# Altium PCB Distro_layout_top_buck.PcbDoc
Units mm, origin at the board's own origin, x right, y up, seen from the top; angles counter-clockwise.
Board outline 45.08 x 37.66 mm, 2 copper layers (Top Layer, Bottom Layer); 19 components, 12 nets, 66 pads, 2 vias.
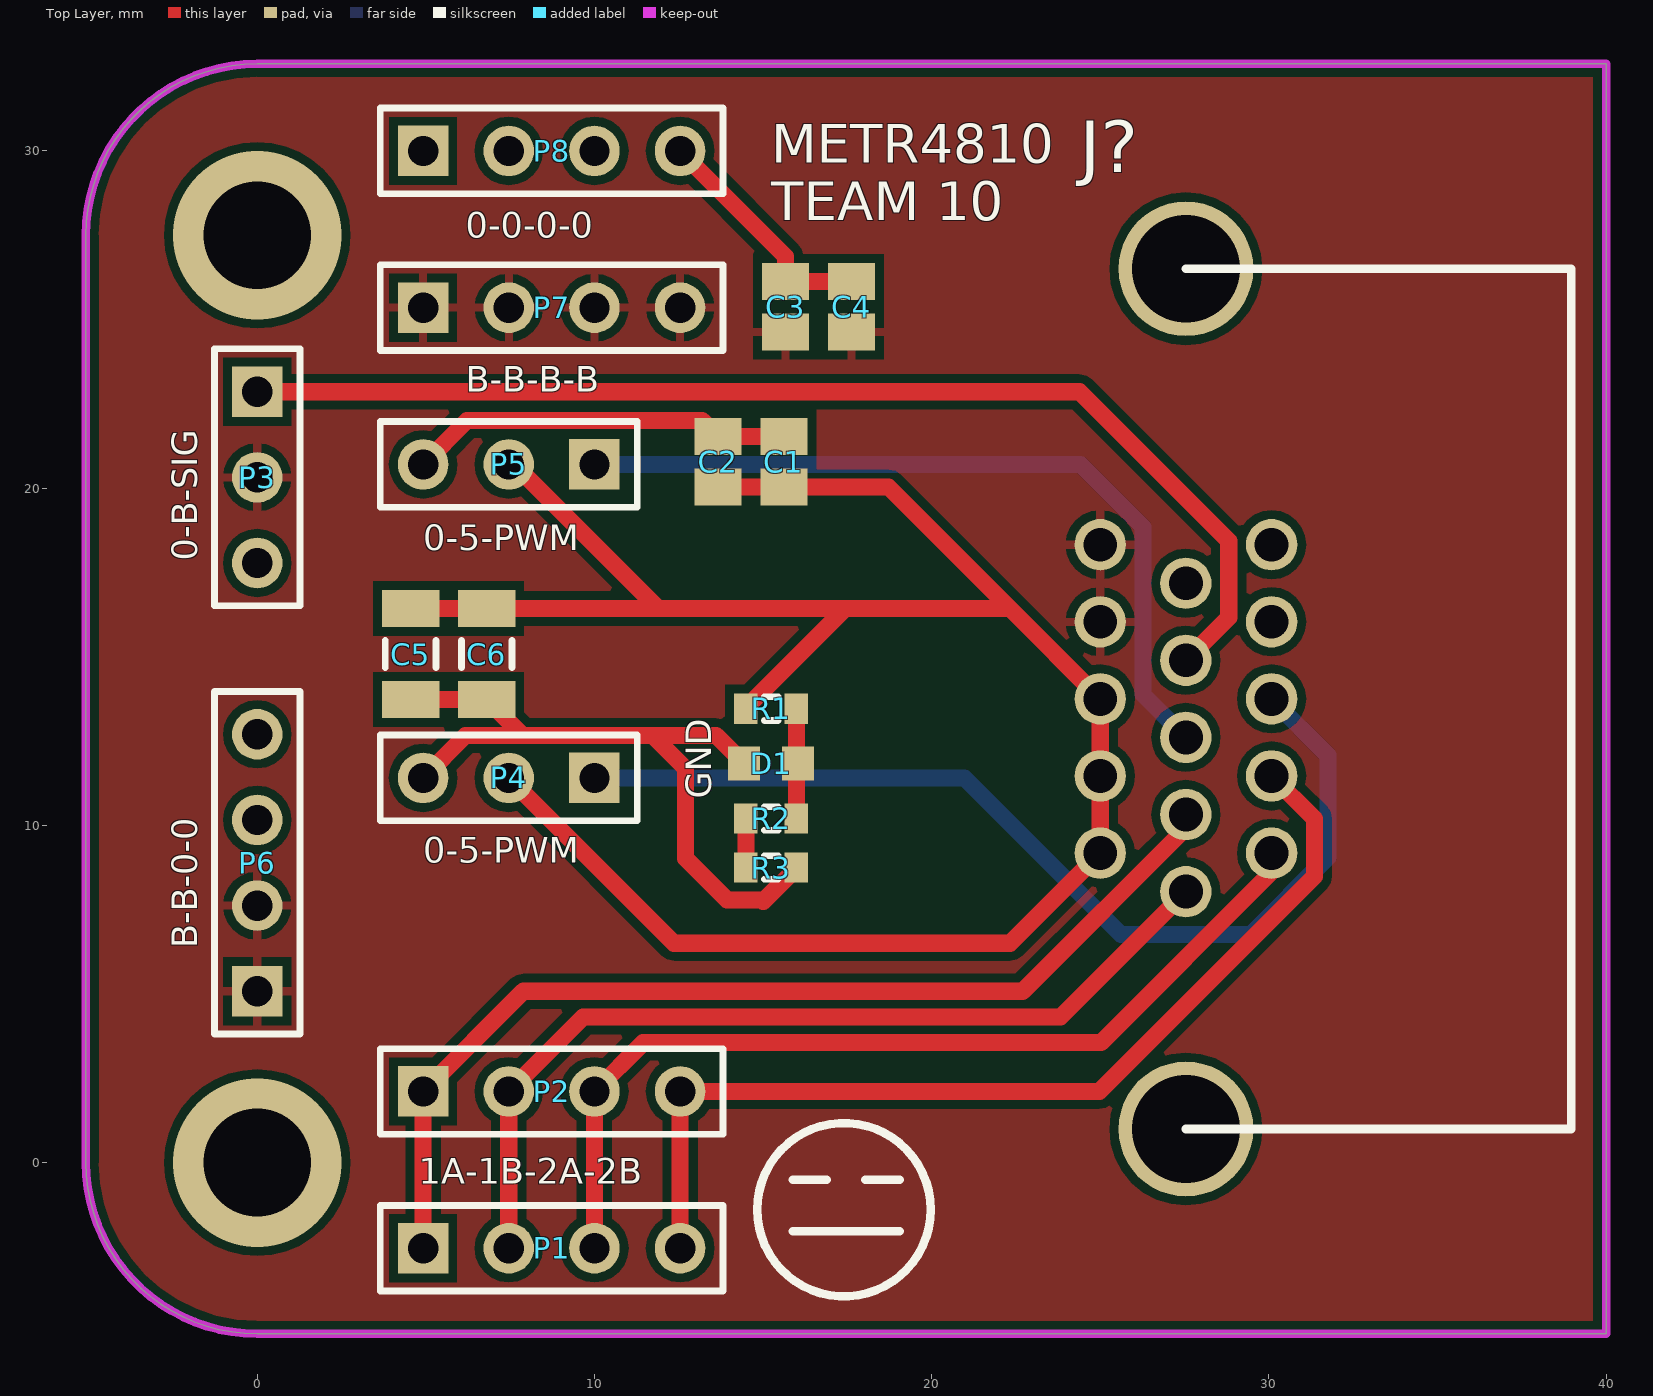
[diagram p0: Top Layer view]
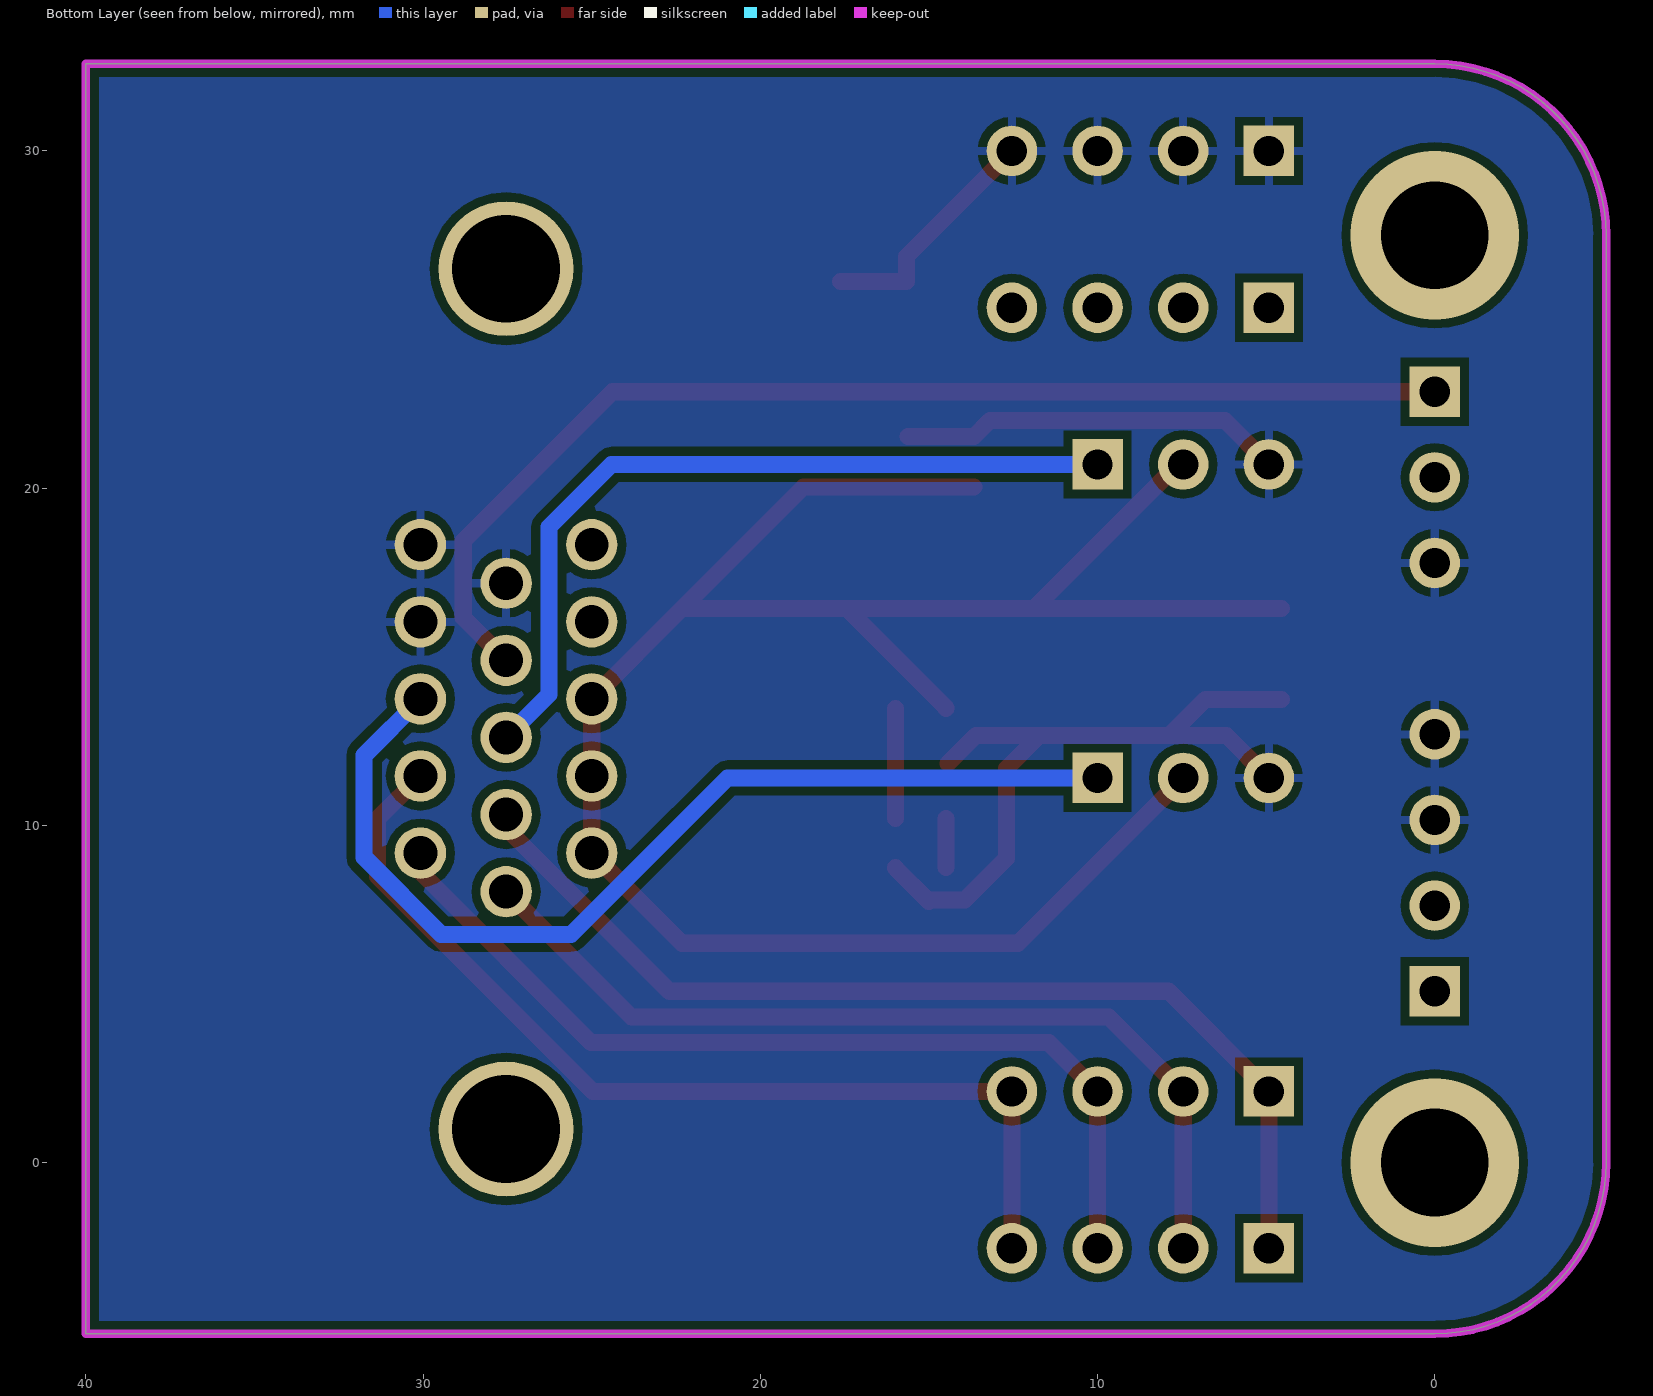
[diagram p1: Bottom Layer view, seen from below]

## Layer stack, top to bottom
Top Solder: solder mask 0.0102, Solder Resist, Dk 3.5
Top Layer: signal copper 0.0356
Dielectric 1: dielectric 0.32, FR-4, Dk 4.8
Bottom Layer: signal copper 0.0356
Bottom Solder: solder mask 0.0102, Solder Resist, Dk 3.5

## Board outline
-5.08,0 ccw(c0,0) 0,-5.08 40,-5.08 40,32.58 0,32.58 ccw(c0,27.5) -5.08,27.5

## Design rules (kind name [scope] priority, off if disabled: settings)
Clearance [All] p1: gap=0.254
PolygonConnect [All] p1: connectstyle=Relief reliefconductorwidth=0.254 reliefentries=4 polygonreliefangle="90 Angle" airgapwidth=0.254
RoomDefinition Distro_schematic [InComponentClass('Distro_schematic')] p1: confinementstyle=ConfineIn formatcopy=TRUE lockcomponents=FALSE outline -5.08,-5.08 40,-5.08 40,32.58 -5.08,32.58
RoutingVias [All] p1: holewidth=0.711 width=1.27 viastyle="Through Hole" minholewidth=0.711 minwidth=1.27 maxholewidth=0.711 maxwidth=1.27
SolderMaskExpansion [All] p1: expansion=0.102
Width [All] p1: maxlimit=1.016 minlimit=0.254 preferedwidth=0.508
30 further rules are at their usual default settings.

## Components (designator, comment, footprint, x,y, rotation, side; value= is the part's Value field where it differs from the comment)
C1 "Cap Pol3" C0805 15.621,20.783 r90 top
C2 "Cap Pol3" C0805 13.667,20.783 r90 top
C3 "Cap Pol3" C0805 15.669,25.383 r90 top
C4 "Cap Pol3" C0805 17.624,25.383 r90 top
C5 "Cap Semi" C1206 4.55,15.08 r90 top
C6 "Cap Semi" C1206 6.804,15.08 r90 top
D1 "LED1" L0603 15.24,11.833 r180 top
J? "Connector 15" PCBComponent_1 25,18.322 r270 top
P1 "Header 4" HDR1X4 4.92,-2.54 r0 top
P2 "Header 4" HDR1X4 4.92,2.109 r0 top
P3 "Header 3" HDR1X3 0,22.86 r270 top
P4 "Header 3" HDR1X3 10,11.406 r180 top
P5 "Header 3" HDR1X3 10,20.703 r180 top
P6 "Header 4" HDR1X4 0,5.08 r90 top
P7 "Header 4" HDR1X4 4.92,25.351 r0 top
P8 "Header 4" HDR1X4 4.92,30 r0 top
R1 "Res3" J1-0603 15.24,13.462 r0 top
R2 "Res3" J1-0603 15.24,10.203 r180 top
R3 "Res3" J1-0603 15.24,8.749 r0 top

## Footprints (in the part's own frame and the unit in brackets; to place one, negate y for a bottom-side part, rotate by r counter-clockwise, add the part's x,y. Pads: shape width x height; smd on the part's side, far side on the other; paste and mask are expansions set on the pad)
C0805 [mm] "Chip Capacitor, Body 2.0x1.3mm, IPC High Density"
  rect 1.1x1.4 smd: 1(-0.75,0) 2(0.75,0)
  body extent -1.1,-0.72 1.1,0.72, height 1.4
C1206 [mm] "Chip Capacitor, Body 3.2x1.6mm, IPC High Density"
  rect 1.1x1.7 smd: 1(-1.35,0) 2(1.35,0)
  silkscreen extent -0.4,-0.75 0.4,0.75, body extent -1.7,-0.9 1.7,0.9, height 1.3
HDR1X3 [mm] "Connector; Header; 3 Position"
  rect 1.5x1.5 hole 0.9: 1(0,0)
  round 1.5 hole 0.9: 2(2.54,0) 3(5.08,0)
  silkscreen extent -1.27,-1.27 6.35,1.27
HDR1X4 [mm] "Connector; Header; 4 Position"
  rect 1.5x1.5 hole 0.9: 1(0,0)
  round 1.5 hole 0.9: 2(2.54,0) 3(5.08,0) 4(7.62,0)
  silkscreen extent -1.27,-1.27 8.89,1.27
J1-0603 [mm] "Chip Resistor, Body 1.6x0.8mm, IPC High Density"
  rect 0.7x0.9 smd: 1(-0.75,0) 2(0.75,0)
  silkscreen extent -0.2,-0.35 0.2,0.35, body extent -0.85,-0.48 0.85,0.48, height 0.9
L0603 [mm]
  rect 0.95x1 smd: 1(-0.8,0) 2(0.8,0)
PCBComponent_1 [mil]
  round 60 hole 39.37: 1(360,200) 2(270,200) 3(180,200) 4(90,200) 5(0,200) 6(405,100) 7(315,100) 8(225,100) 9(135,100) 10(45,100) 11(360,0) 12(270,0) 13(180,0) 14(90,0) 15(0,0)
  round 157.48 hole 125.98: 16(682.17,100) 17(-322.17,100)
  silkscreen extent -322,100 682,550

## Part data
C1 C2 C3 C4: "Polarized Capacitor (Surface Mount)"
C5 C6: "Capacitor (Semiconductor SIM Model)"
D1: "Typical RED GaAs LED"
J?: "Receptacle Assembly, 15-Pin, Sim Line Connector"
P1 P2 P6 P7 P8: "Header, 4-Pin"
P3 P4 P5: "Header, 3-Pin"
R1 R2 R3: "Resistor"

## Via types
v1: diameter 5, hole 3.2, Top Layer to Bottom Layer, 2 vias

## Nets (pads, with @x,y where several pads share a name; then routed paths per layer and width w, separated by ;. In a path a pad name is that pad's centre, name@x,y a point inside that pad or via, vN(x,y) a via of type N, cw(c..) or ccw(c..) an arc to the next point about the centre after c; other vN are vias at no path point)
BAT: C3.1 C4.1 J?.14 J?.15 P3.2 P6.1 P6.2 P7.1 P7.2 P7.3 P7.4
CAM_SIG: J?.9 P3.1 | length 34.7
  Top Layer w0.508: P3.1 24.384,22.86 28.81,18.434 28.81,16.163 J?.9
GND: C1.2 C2.2 C3.2 C4.2 C5.1 C6.1 D1.2 J?.4 J?.5 J?.10 P3.3 P4.3 P5.3 P6.3 P6.4 P8.1 P8.2 P8.3 P8.4 R3.2 | length 41
  Top Layer w0.508: C5.1 C6.1 7.871,12.664 ; P4.3 6.178,12.664 7.871,12.664 ; P5.3 6.223,22.006 13.194,22.006 C2.2 C1.2 ; P8.4 15.669,26.871 C3.2 C4.2 ; D1.2 13.609,12.664 11.72,12.664 ; R3.2 15.99,8.731 15.006,7.747 14.962,7.791 13.93,7.791 12.7,9.021 12.7,11.684 11.72,12.664 ; 7.871,12.664 11.72,12.664
MOTOR_1A: J?.7 P1.1 P2.1 | length 30.9
  Top Layer w0.508: P1.1 P2.1 7.891,5.08 22.698,5.08 27.54,9.922 J?.7
MOTOR_1B: J?.6 P1.2 P2.2 | length 27.2
  Top Layer w0.508: P1.2 P2.2 9.669,4.318 23.823,4.318 J?.6
MOTOR_2A: J?.1 P1.3 P2.3 | length 28
  Top Layer w0.508: P1.3 P2.3 11.447,3.556 25.019,3.556 30.08,8.617 J?.1
MOTOR_2B: J?.2 P1.4 P2.4 | length 29.6
  Top Layer w0.508: P1.4 P2.4 24.969,2.109 31.35,8.49 31.35,10.194 J?.2
NetD1_1: D1.1 R1.2 R2.1 | length 3.3
  Top Layer w0.508: R2.1 R1.2
NetR2_2: R2.2 R3.1 | length 1.5
  Top Layer w0.508: R3.1 R2.2
"PWM SV 1": J?.8 P5.1 | length 23.8
  Bottom Layer w0.508: P5.1 24.415,20.703 26.27,18.848 26.27,13.877 J?.8
"PWM SV 2": J?.3 P4.1 | length 30
  Bottom Layer w0.508: P4.1 20.976,11.406 25.617,6.765 29.463,6.765 31.75,9.052 31.75,12.08 J?.3
VCC: C1.1 C2.1 C5.2 C6.2 J?.11 J?.12 J?.13 P4.2 P5.2 R1.1 | length 67.4
  Top Layer w0.508: C5.2 C6.2 11.891,16.43 ; P4.2 12.363,6.503 22.325,6.503 J?.11 J?.12 J?.13 22.32,16.43 ; P5.2 7.618,20.703 11.891,16.43 ; C2.1 C1.1 18.717,20.033 22.32,16.43 ; R1.1@14.512,13.484 R1.1 14.49,13.48 17.44,16.43 ; 11.891,16.43 17.44,16.43 ; 17.44,16.43 22.32,16.43
pads on no net: J?.16 J?.17
copper on no net:
  other v1: 0,0 0,27.5

## Polygon pours and split planes (outlines as drawn)
BAT on Top Layer "BAT_L01_P000" (solid, remove dead copper, pour order 0): -5.08,-5.08 -5.08,32.58 40,32.58 40,-5.08
GND on Bottom Layer "GND_L02_P001" (solid, remove dead copper, pour order 1): -5.08,-5.08 -5.08,32.58 40,32.58 40,-5.08

## Keep-outs
Keep-Out Layer:
  the board outline again, w0.254

## Silkscreen, mask and mechanical layers (free items; w line width, h text height)
Top Overlay:
  circle w0.254: c17.399,-1.397 r2.572
  lines w0.254: 15.875,-2.032 19.05,-2.032 ; 15.875,-0.508 16.891,-0.508 ; 18.034,-0.508 19.05,-0.508
  text "METR4810 / TEAM 10" at 15.24,27.94 h1.14
  text "0-0-0-0" at 6.191,27.432 h0.76
  text "B-B-B-B" at 6.191,22.86 h0.76
  text "0-5-PWM" at 4.921,18.161 h0.76
  text "0-B-SIG" at -1.778,17.844 h0.76 r90
  text "GND" at 13.462,10.795 h0.76 r90
  text "0-5-PWM" at 4.921,8.89 h0.76
  text "B-B-0-0" at -1.778,6.351 h0.76 r90
  text "1A-1B-2A-2B" at 4.794,-0.635 h0.76